# Altium PCB DSP6748_F.PcbDoc (part 7 of 16)
Units mil, origin at the board's own origin, x right, y up, seen from the top; angles counter-clockwise.
Board outline 8188.98 x 4055.12 mil, 4 copper layers (Top Layer, GND, VCC, Bottom Layer); 409 components, 262 nets, 1424 pads, 350 vias.
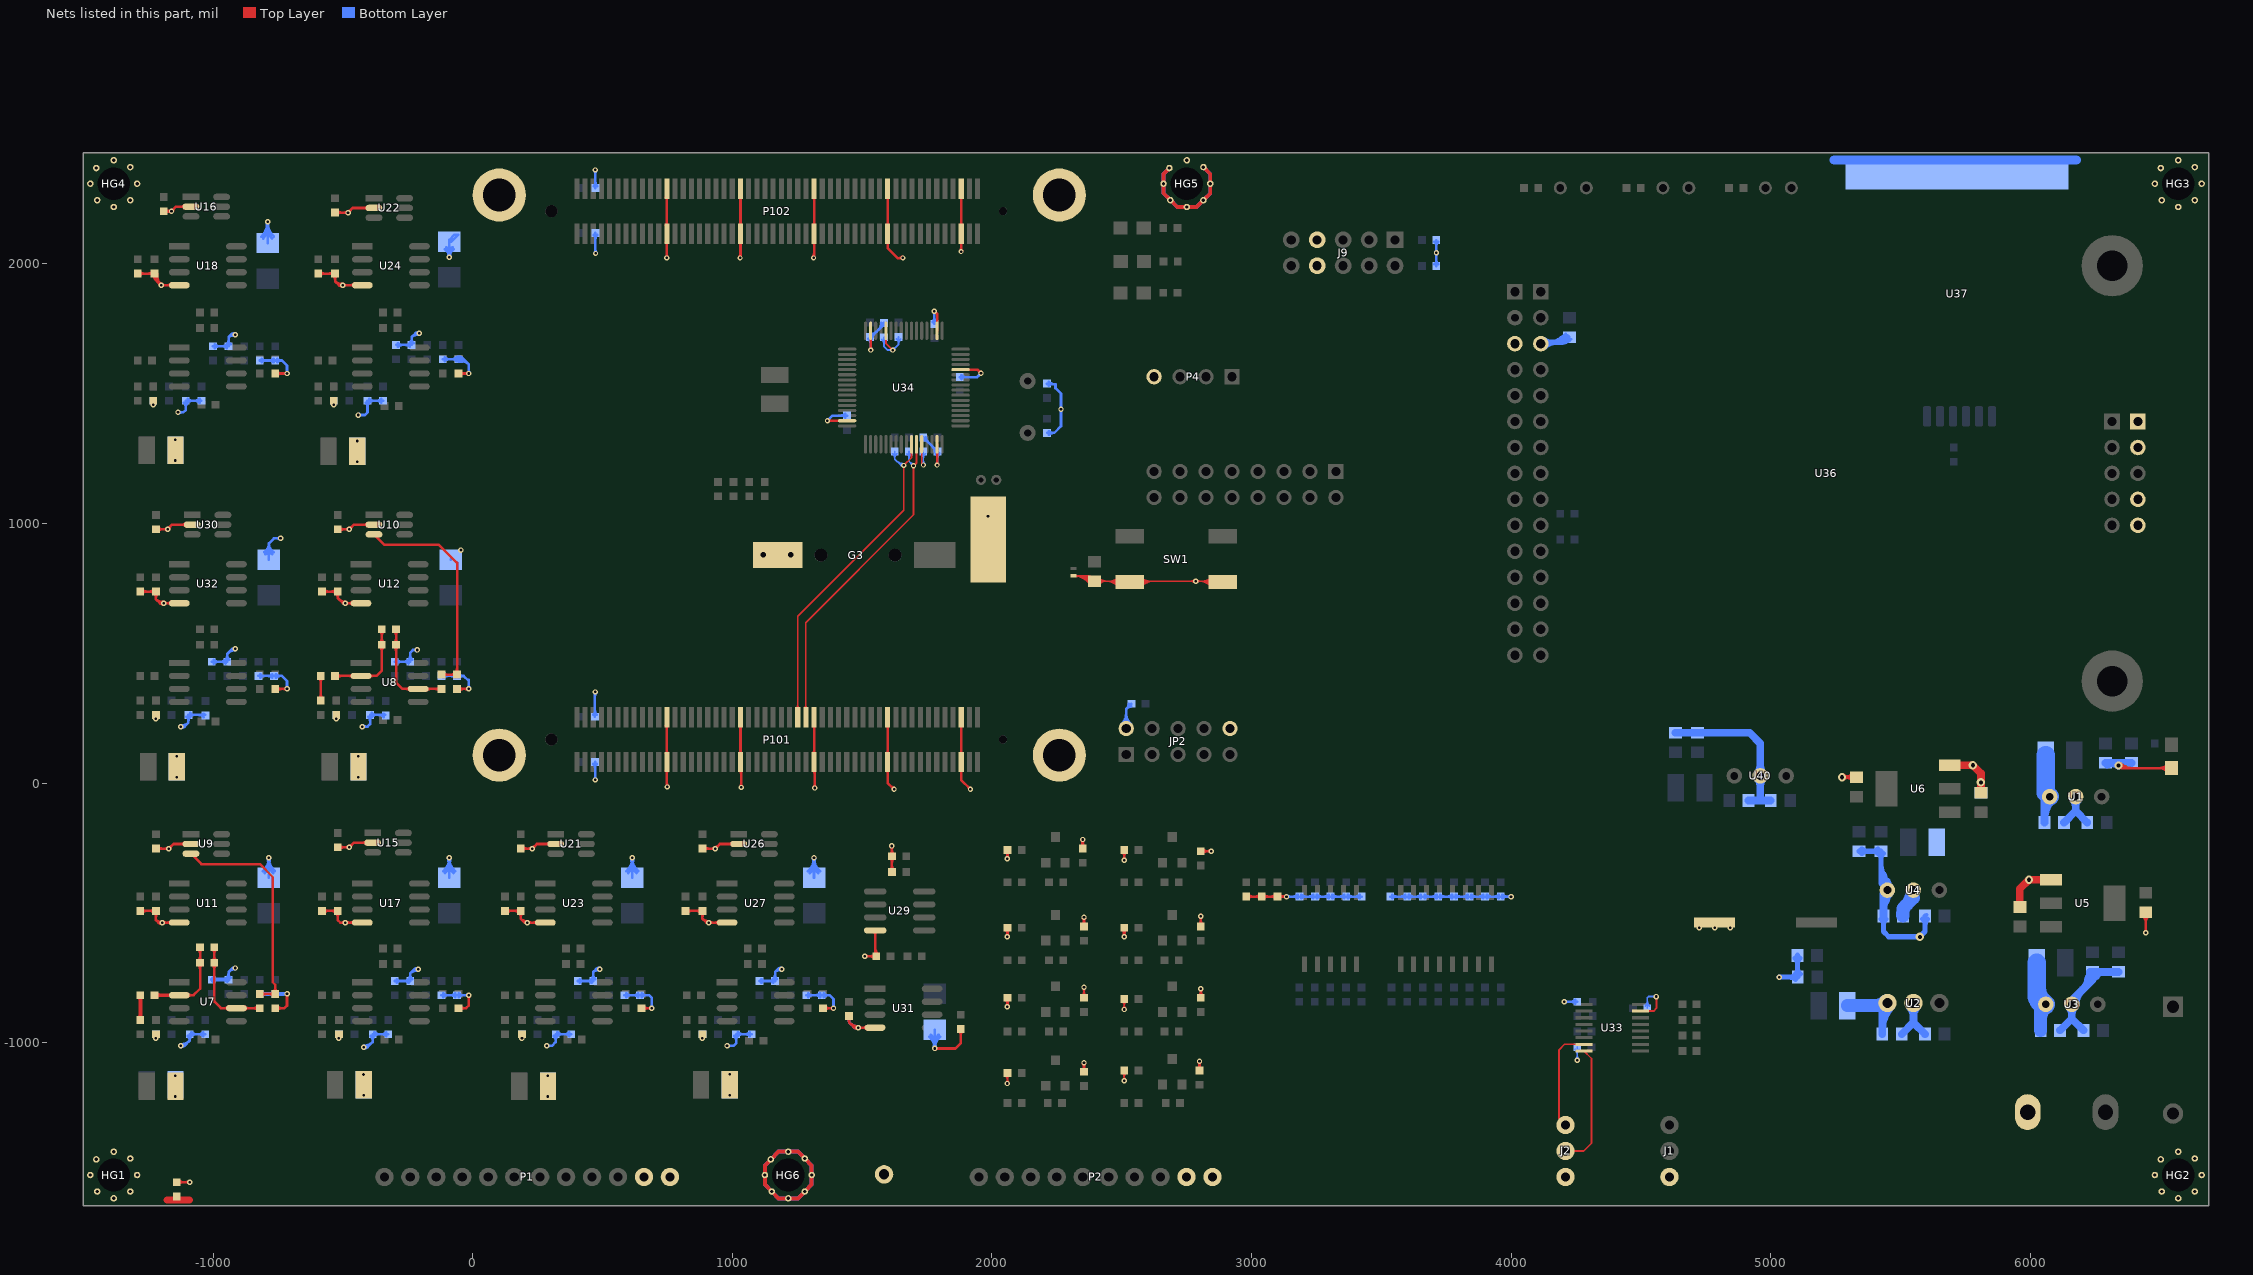
[diagram p9: the nets of this part, all layers, seen from the top]

## Via types
v1: diameter 21, hole 10, Top Layer to Bottom Layer, 244 vias
v2: diameter 20, hole 10, Top Layer to Bottom Layer, 84 vias
v3: diameter 32, hole 16, Top Layer to Bottom Layer, 11 vias
v4: diameter 24, hole 12, Top Layer to Bottom Layer, 7 vias
v5: diameter 39.37, hole 19.68, Top Layer to Bottom Layer, 3 vias
v6: diameter 30, hole 15, Top Layer to Bottom Layer, 1 vias

## Nets (pads, with @x,y where several pads share a name; then routed paths per layer and width w, separated by ;. In a path a pad name is that pad's centre, name@x,y a point inside that pad or via, vN(x,y) a via of type N, cw(c..) or ccw(c..) an arc to the next point about the centre after c; other vN are vias at no path point) (continued)
GND: (continued)
  Bottom Layer w10: C149.2@1764.44,-969.19 cw(c1738.22,-1001.47) 1779.81,-1001.47 ; C149.2@1764.44,-969.19 cw(c1738.22,-1001.47) 1779.81,-1001.47 ; v1@1775.05,-1019.73 ccw(c1763.54,-1013.09) 1776.37,-1009.65 ; v1@1775.05,-1019.73 ccw(c1763.54,-1013.09) 1776.37,-1009.65 ; v1@1775.05,-1019.73 ccw(c1763.54,-1013.09) 1776.37,-1009.65 ; v1@1775.92,-1018.59 ccw(c1766.53,-1009.2) 1779.81,-1009.2 ; v1@1775.92,-1018.59 ccw(c1766.53,-1009.2) 1779.81,-1009.2 ; v1@1775.92,-1018.59 ccw(c1766.53,-1009.2) 1779.81,-1009.2 ; 1776.37,-1009.66 ccw(c1789.2,-1006.22) v1@1782.56,-1017.72 ; 1776.37,-1009.66 ccw(c1789.2,-1006.22) v1@1782.56,-1017.72 ; 1776.37,-1009.66 ccw(c1789.2,-1006.22) v1@1782.56,-1017.72 ; v1@1777.06,-1017.72 ccw(c1770.42,-1006.22) 1783.24,-1009.66 ; v1@1777.06,-1017.72 ccw(c1770.42,-1006.22) 1783.24,-1009.66 ; v1@1777.06,-1017.72 ccw(c1770.42,-1006.22) 1783.24,-1009.66 ; v1(1779.81,-1022.48) cw(c1838.46,-1022.48) C149.2@1801.48,-976.95 ; v1(1779.81,-1022.48) cw(c1838.46,-1022.48) C149.2@1801.48,-976.95 ; v1(1779.81,-1022.48) cw(c1838.46,-1022.48) C149.2@1801.48,-976.95 ; 1779.81,-1009.2 ccw(c1793.09,-1009.2) v1@1783.7,-1018.59 ; 1779.81,-1009.2 ccw(c1793.09,-1009.2) v1@1783.7,-1018.59 ; 1779.81,-1009.2 ccw(c1793.09,-1009.2) v1@1783.7,-1018.59 ; 1779.81,-1001.47 cw(c1821.4,-1001.47) C149.2@1795.18,-969.19 ; 1779.81,-1001.47 cw(c1821.4,-1001.47) C149.2@1795.18,-969.19 ; 1779.81,-1001.47 cw(c1821.4,-1001.47) C149.2@1795.18,-969.19 ; 1783.25,-1009.65 ccw(c1796.08,-1013.09) v1@1784.57,-1019.73 ; 1783.25,-1009.65 ccw(c1796.08,-1013.09) v1@1784.57,-1019.73 ; 1783.25,-1009.65 ccw(c1796.08,-1013.09) v1@1784.57,-1019.73 ; v1@3138.7,-441.37 cw(c3148.09,-450.76) 3148.09,-437.48 ; v1@3138.7,-441.37 cw(c3148.09,-450.76) 3148.09,-437.48 ; v1@3138.7,-441.37 cw(c3148.09,-450.76) 3148.09,-437.48 ; v1@3138.7,-433.59 ccw(c3148.09,-424.2) 3148.09,-437.48 ; v1@3138.7,-433.59 ccw(c3148.09,-424.2) 3148.09,-437.48 ; v1@3138.7,-433.59 ccw(c3148.09,-424.2) 3148.09,-437.48 ; 3160.67,-437.48 cw(c3160.67,-461.62) R124.1@3177.74,-444.55 ; 3160.67,-437.48 ccw(c3160.67,-413.34) R124.1@3177.74,-430.41 ; 3160.67,-437.48 cw(c3160.67,-461.62) R124.1@3177.74,-444.55 ; 3160.67,-437.48 ccw(c3160.67,-413.34) R124.1@3177.74,-430.41 ; 3160.67,-437.48 ccw(c3160.67,-413.34) R124.1@3177.74,-430.41 ; 3160.67,-437.48 cw(c3160.67,-461.62) R124.1@3177.74,-444.55 ; R124.1@3191.88,-444.55 cw(c3208.95,-461.62) 3208.95,-437.48 ; R124.1@3191.88,-444.55 cw(c3208.95,-461.62) 3208.95,-437.48 ; R124.1@3191.88,-444.55 cw(c3208.95,-461.62) 3208.95,-437.48 ; R124.1@3191.88,-430.41 ccw(c3208.95,-413.34) 3208.95,-437.48 ; R124.1@3191.88,-430.41 ccw(c3208.95,-413.34) 3208.95,-437.48 ; R124.1@3191.88,-430.41 ccw(c3208.95,-413.34) 3208.95,-437.48 ; 3220.67,-437.48 cw(c3220.67,-461.62) R125.1@3237.74,-444.55 ; 3220.67,-437.48 ccw(c3220.67,-413.34) R125.1@3237.74,-430.41 ; 3220.67,-437.48 cw(c3220.67,-461.62) R125.1@3237.74,-444.55 ; 3220.67,-437.48 ccw(c3220.67,-413.34) R125.1@3237.74,-430.41 ; 3220.67,-437.48 ccw(c3220.67,-413.34) R125.1@3237.74,-430.41 ; 3220.67,-437.48 cw(c3220.67,-461.62) R125.1@3237.74,-444.55 ; R125.1@3251.88,-444.55 cw(c3268.95,-461.62) 3268.95,-437.48 ; R125.1@3251.88,-444.55 cw(c3268.95,-461.62) 3268.95,-437.48 ; R125.1@3251.88,-444.55 cw(c3268.95,-461.62) 3268.95,-437.48 ; R125.1@3251.88,-430.41 ccw(c3268.95,-413.34) 3268.95,-437.48 ; R125.1@3251.88,-430.41 ccw(c3268.95,-413.34) 3268.95,-437.48 ; R125.1@3251.88,-430.41 ccw(c3268.95,-413.34) 3268.95,-437.48 ; 3280.67,-437.48 cw(c3280.67,-461.62) R126.1@3297.74,-444.55 ; 3280.67,-437.48 ccw(c3280.67,-413.34) R126.1@3297.74,-430.41 ; 3280.67,-437.48 cw(c3280.67,-461.62) R126.1@3297.74,-444.55 ; 3280.67,-437.48 ccw(c3280.67,-413.34) R126.1@3297.74,-430.41 ; 3280.67,-437.48 ccw(c3280.67,-413.34) R126.1@3297.74,-430.41 ; 3280.67,-437.48 cw(c3280.67,-461.62) R126.1@3297.74,-444.55 ; R126.1@3311.88,-444.55 cw(c3328.95,-461.62) 3328.95,-437.48 ; R126.1@3311.88,-444.55 cw(c3328.95,-461.62) 3328.95,-437.48 ; R126.1@3311.88,-444.55 cw(c3328.95,-461.62) 3328.95,-437.48 ; R126.1@3311.88,-430.41 ccw(c3328.95,-413.34) 3328.95,-437.48 ; R126.1@3311.88,-430.41 ccw(c3328.95,-413.34) 3328.95,-437.48 ; R126.1@3311.88,-430.41 ccw(c3328.95,-413.34) 3328.95,-437.48 ; 3340.67,-437.48 cw(c3340.67,-461.62) R127.1@3357.74,-444.55 ; 3340.67,-437.48 ccw(c3340.67,-413.34) R127.1@3357.74,-430.41 ; 3340.67,-437.48 cw(c3340.67,-461.62) R127.1@3357.74,-444.55 ; 3340.67,-437.48 ccw(c3340.67,-413.34) R127.1@3357.74,-430.41 ; 3340.67,-437.48 ccw(c3340.67,-413.34) R127.1@3357.74,-430.41 ; 3340.67,-437.48 cw(c3340.67,-461.62) R127.1@3357.74,-444.55 ; R127.1@3371.88,-444.55 cw(c3388.95,-461.62) 3388.95,-437.48 ; R127.1@3371.88,-444.55 cw(c3388.95,-461.62) 3388.95,-437.48 ; R127.1@3371.88,-444.55 cw(c3388.95,-461.62) 3388.95,-437.48 ; R127.1@3371.88,-430.41 ccw(c3388.95,-413.34) 3388.95,-437.48 ; R127.1@3371.88,-430.41 ccw(c3388.95,-413.34) 3388.95,-437.48 ; R127.1@3371.88,-430.41 ccw(c3388.95,-413.34) 3388.95,-437.48 ; 3400.67,-437.48 cw(c3400.67,-461.62) R128.1@3417.74,-444.55 ; 3400.67,-437.48 ccw(c3400.67,-413.34) R128.1@3417.74,-430.41 ; 3400.67,-437.48 cw(c3400.67,-461.62) R128.1@3417.74,-444.55 ; 3400.67,-437.48 ccw(c3400.67,-413.34) R128.1@3417.74,-430.41 ; 3400.67,-437.48 ccw(c3400.67,-413.34) R128.1@3417.74,-430.41 ; 3400.67,-437.48 cw(c3400.67,-461.62) R128.1@3417.74,-444.55 ; R151.1@3541.88,-444.55 cw(c3558.95,-461.62) 3558.95,-437.48 ; R151.1@3541.88,-444.55 cw(c3558.95,-461.62) 3558.95,-437.48 ; R151.1@3541.88,-444.55 cw(c3558.95,-461.62) 3558.95,-437.48 ; R151.1@3541.88,-430.41 ccw(c3558.95,-413.34) 3558.95,-437.48 ; R151.1@3541.88,-430.41 ccw(c3558.95,-413.34) 3558.95,-437.48 ; R151.1@3541.88,-430.41 ccw(c3558.95,-413.34) 3558.95,-437.48 ; 3575.67,-437.48 cw(c3575.67,-461.62) R150.1@3592.74,-444.55 ; 3575.67,-437.48 ccw(c3575.67,-413.34) R150.1@3592.74,-430.41 ; 3575.67,-437.48 cw(c3575.67,-461.62) R150.1@3592.74,-444.55 ; 3575.67,-437.48 ccw(c3575.67,-413.34) R150.1@3592.74,-430.41 ; 3575.67,-437.48 ccw(c3575.67,-413.34) R150.1@3592.74,-430.41 ; 3575.67,-437.48 cw(c3575.67,-461.62) R150.1@3592.74,-444.55 ; R150.1@3606.88,-444.55 cw(c3623.95,-461.62) 3623.95,-437.48 ; R150.1@3606.88,-444.55 cw(c3623.95,-461.62) 3623.95,-437.48 ; R150.1@3606.88,-444.55 cw(c3623.95,-461.62) 3623.95,-437.48 ; R150.1@3606.88,-430.41 ccw(c3623.95,-413.34) 3623.95,-437.48 ; R150.1@3606.88,-430.41 ccw(c3623.95,-413.34) 3623.95,-437.48 ; R150.1@3606.88,-430.41 ccw(c3623.95,-413.34) 3623.95,-437.48 ; 3635.67,-437.48 cw(c3635.67,-461.62) R149.1@3652.74,-444.55 ; 3635.67,-437.48 ccw(c3635.67,-413.34) R149.1@3652.74,-430.41 ; 3635.67,-437.48 cw(c3635.67,-461.62) R149.1@3652.74,-444.55 ; 3635.67,-437.48 ccw(c3635.67,-413.34) R149.1@3652.74,-430.41 ; 3635.67,-437.48 ccw(c3635.67,-413.34) R149.1@3652.74,-430.41 ; 3635.67,-437.48 cw(c3635.67,-461.62) R149.1@3652.74,-444.55 ; R149.1@3666.88,-444.55 cw(c3683.95,-461.62) 3683.95,-437.48 ; R149.1@3666.88,-444.55 cw(c3683.95,-461.62) 3683.95,-437.48 ; R149.1@3666.88,-444.55 cw(c3683.95,-461.62) 3683.95,-437.48 ; R149.1@3666.88,-430.41 ccw(c3683.95,-413.34) 3683.95,-437.48 ; R149.1@3666.88,-430.41 ccw(c3683.95,-413.34) 3683.95,-437.48 ; R149.1@3666.88,-430.41 ccw(c3683.95,-413.34) 3683.95,-437.48 ; 3695.67,-437.48 cw(c3695.67,-461.62) R148.1@3712.74,-444.55 ; 3695.67,-437.48 ccw(c3695.67,-413.34) R148.1@3712.74,-430.41 ; 3695.67,-437.48 cw(c3695.67,-461.62) R148.1@3712.74,-444.55 ; 3695.67,-437.48 ccw(c3695.67,-413.34) R148.1@3712.74,-430.41 ; 3695.67,-437.48 ccw(c3695.67,-413.34) R148.1@3712.74,-430.41 ; 3695.67,-437.48 cw(c3695.67,-461.62) R148.1@3712.74,-444.55 ; R148.1@3726.88,-444.55 cw(c3743.95,-461.62) 3743.95,-437.48 ; R148.1@3726.88,-444.55 cw(c3743.95,-461.62) 3743.95,-437.48 ; R148.1@3726.88,-444.55 cw(c3743.95,-461.62) 3743.95,-437.48 ; R148.1@3726.88,-430.41 ccw(c3743.95,-413.34) 3743.95,-437.48 ; R148.1@3726.88,-430.41 ccw(c3743.95,-413.34) 3743.95,-437.48 ; R148.1@3726.88,-430.41 ccw(c3743.95,-413.34) 3743.95,-437.48 ; 3755.67,-437.48 cw(c3755.67,-461.62) R147.1@3772.74,-444.55 ; 3755.67,-437.48 ccw(c3755.67,-413.34) R147.1@3772.74,-430.41 ; 3755.67,-437.48 cw(c3755.67,-461.62) R147.1@3772.74,-444.55 ; 3755.67,-437.48 ccw(c3755.67,-413.34) R147.1@3772.74,-430.41 ; 3755.67,-437.48 ccw(c3755.67,-413.34) R147.1@3772.74,-430.41 ; 3755.67,-437.48 cw(c3755.67,-461.62) R147.1@3772.74,-444.55 ; R147.1@3786.88,-444.55 cw(c3803.95,-461.62) 3803.95,-437.48 ; R147.1@3786.88,-444.55 cw(c3803.95,-461.62) 3803.95,-437.48 ; R147.1@3786.88,-444.55 cw(c3803.95,-461.62) 3803.95,-437.48 ; R147.1@3786.88,-430.41 ccw(c3803.95,-413.34) 3803.95,-437.48 ; R147.1@3786.88,-430.41 ccw(c3803.95,-413.34) 3803.95,-437.48 ; R147.1@3786.88,-430.41 ccw(c3803.95,-413.34) 3803.95,-437.48 ; 3815.67,-437.48 cw(c3815.67,-461.62) R146.1@3832.74,-444.55 ; 3815.67,-437.48 ccw(c3815.67,-413.34) R146.1@3832.74,-430.41 ; 3815.67,-437.48 cw(c3815.67,-461.62) R146.1@3832.74,-444.55 ; 3815.67,-437.48 ccw(c3815.67,-413.34) R146.1@3832.74,-430.41 ; 3815.67,-437.48 ccw(c3815.67,-413.34) R146.1@3832.74,-430.41 ; 3815.67,-437.48 cw(c3815.67,-461.62) R146.1@3832.74,-444.55 ; R146.1@3846.88,-444.55 cw(c3863.95,-461.62) 3863.95,-437.48 ; R146.1@3846.88,-444.55 cw(c3863.95,-461.62) 3863.95,-437.48 ; R146.1@3846.88,-444.55 cw(c3863.95,-461.62) 3863.95,-437.48 ; R146.1@3846.88,-430.41 ccw(c3863.95,-413.34) 3863.95,-437.48 ; R146.1@3846.88,-430.41 ccw(c3863.95,-413.34) 3863.95,-437.48 ; R146.1@3846.88,-430.41 ccw(c3863.95,-413.34) 3863.95,-437.48 ; 3875.67,-437.48 cw(c3875.67,-461.62) R145.1@3892.74,-444.55 ; 3875.67,-437.48 ccw(c3875.67,-413.34) R145.1@3892.74,-430.41 ; 3875.67,-437.48 cw(c3875.67,-461.62) R145.1@3892.74,-444.55 ; 3875.67,-437.48 ccw(c3875.67,-413.34) R145.1@3892.74,-430.41 ; 3875.67,-437.48 ccw(c3875.67,-413.34) R145.1@3892.74,-430.41 ; 3875.67,-437.48 cw(c3875.67,-461.62) R145.1@3892.74,-444.55 ; R145.1@3906.88,-444.55 cw(c3923.95,-461.62) 3923.95,-437.48 ; R145.1@3906.88,-444.55 cw(c3923.95,-461.62) 3923.95,-437.48 ; R145.1@3906.88,-444.55 cw(c3923.95,-461.62) 3923.95,-437.48 ; R145.1@3906.88,-430.41 ccw(c3923.95,-413.34) 3923.95,-437.48 ; R145.1@3906.88,-430.41 ccw(c3923.95,-413.34) 3923.95,-437.48 ; R145.1@3906.88,-430.41 ccw(c3923.95,-413.34) 3923.95,-437.48 ; 3935.67,-437.48 cw(c3935.67,-461.62) R144.1@3952.74,-444.55 ; 3935.67,-437.48 ccw(c3935.67,-413.34) R144.1@3952.74,-430.41 ; 3935.67,-437.48 cw(c3935.67,-461.62) R144.1@3952.74,-444.55 ; 3935.67,-437.48 ccw(c3935.67,-413.34) R144.1@3952.74,-430.41 ; 3935.67,-437.48 ccw(c3935.67,-413.34) R144.1@3952.74,-430.41 ; 3935.67,-437.48 cw(c3935.67,-461.62) R144.1@3952.74,-444.55 ; R144.1@3966.88,-444.55 cw(c3983.95,-461.62) 3983.95,-437.48 ; R144.1@3966.88,-444.55 cw(c3983.95,-461.62) 3983.95,-437.48 ; R144.1@3966.88,-444.55 cw(c3983.95,-461.62) 3983.95,-437.48 ; R144.1@3966.88,-430.41 ccw(c3983.95,-413.34) 3983.95,-437.48 ; R144.1@3966.88,-430.41 ccw(c3983.95,-413.34) 3983.95,-437.48 ; R144.1@3966.88,-430.41 ccw(c3983.95,-413.34) 3983.95,-437.48 ; 3986.53,-437.48 cw(c3986.53,-450.76) v1@3995.92,-441.37 ; 3986.53,-437.48 ccw(c3986.53,-424.2) v1@3995.92,-433.59 ; 3986.53,-437.48 cw(c3986.53,-450.76) v1@3995.92,-441.37 ; 3986.53,-437.48 ccw(c3986.53,-424.2) v1@3995.92,-433.59 ; 3986.53,-437.48 ccw(c3986.53,-424.2) v1@3995.92,-433.59 ; 3986.53,-437.48 cw(c3986.53,-450.76) v1@3995.92,-441.37 ; U36.J2-3@4119.71,1692.52 ccw(c4119.71,1820.12) C170.2@4209.94,1729.89 ; U36.J2-3@4119.71,1692.52 ccw(c4119.71,1820.12) C170.2@4209.94,1729.89 ; U36.J2-3@4119.71,1692.52 ccw(c4119.71,1820.12) C170.2@4209.94,1729.89 ; U36.J2-3@4123.65,1704.64 ccw(c4142.75,1730.85) 4149.77,1699.18 ; U36.J2-3@4123.65,1704.64 ccw(c4142.75,1730.85) 4149.77,1699.18 ; U36.J2-3@4123.65,1704.64 ccw(c4142.75,1730.85) 4149.77,1699.18 ; U36.J2-3@4125.42,1681.91 cw(c4151.02,1656.31) 4151.02,1692.52 ; U36.J2-3@4125.42,1681.91 cw(c4151.02,1656.31) 4151.02,1692.52 ; U36.J2-3@4125.42,1681.91 cw(c4151.02,1656.31) 4151.02,1692.52 ; U36.J2-3@4125.42,1703.13 ccw(c4151.02,1728.73) 4151.02,1692.52 ; U36.J2-3@4125.42,1703.13 ccw(c4151.02,1728.73) 4151.02,1692.52 ; U36.J2-3@4125.42,1703.13 ccw(c4151.02,1728.73) 4151.02,1692.52 ; U36.J2-3@4127.37,1700.72 ccw(c4142.51,1710.6) 4145.21,1692.73 ; U36.J2-3@4127.37,1700.72 ccw(c4142.51,1710.6) 4145.21,1692.73 ; U36.J2-3@4127.37,1700.72 ccw(c4142.51,1710.6) 4145.21,1692.73 ; U36.J2-3@4127.47,1684.47 cw(c4154.89,1667.03) 4147.86,1698.76 ; U36.J2-3@4127.47,1684.47 cw(c4154.89,1667.03) 4147.86,1698.76 ; U36.J2-3@4127.47,1684.47 cw(c4154.89,1667.03) 4147.86,1698.76 ; U36.J2-3@4129.54,1712.72 ccw(c4160.15,1754.72) 4171.4,1703.98 ; U36.J2-3@4129.54,1712.72 ccw(c4160.15,1754.72) 4171.4,1703.98 ; U36.J2-3@4129.54,1712.72 ccw(c4160.15,1754.72) 4171.4,1703.98 ; U36.J2-3@4132.49,1674.84 cw(c4175.16,1632.16) 4175.16,1692.52 ; U36.J2-3@4132.49,1674.84 cw(c4175.16,1632.16) 4175.16,1692.52 ; U36.J2-3@4132.49,1674.84 cw(c4175.16,1632.16) 4175.16,1692.52 ; U36.J2-3@4132.49,1710.2 ccw(c4175.16,1752.88) 4175.16,1692.52 ; U36.J2-3@4132.49,1710.2 ccw(c4175.16,1752.88) 4175.16,1692.52 ; U36.J2-3@4132.49,1710.2 ccw(c4175.16,1752.88) 4175.16,1692.52 ; U36.J2-3@4135.75,1706.18 ccw(c4156.82,1719.94) 4160.59,1695.05 ; U36.J2-3@4135.75,1706.18 ccw(c4156.82,1719.94) 4160.59,1695.05 ; U36.J2-3@4135.75,1706.18 ccw(c4156.82,1719.94) 4160.59,1695.05 ; U36.J2-3@4135.85,1679.01 cw(c4165.94,1659.7) 4160.59,1695.05 ; U36.J2-3@4135.85,1679.01 cw(c4165.94,1659.7) 4160.59,1695.05 ; U36.J2-3@4135.85,1679.01 cw(c4165.94,1659.7) 4160.59,1695.05 ; U36.J2-3@4135.9,1679.1 cw(c4183.65,1648.74) 4171.4,1703.98 ; U36.J2-3@4135.9,1679.1 cw(c4183.65,1648.74) 4171.4,1703.98 ; U36.J2-3@4135.9,1679.1 cw(c4183.65,1648.74) 4171.4,1703.98 ; U36.J2-3@4143.85,1692.52 ccw(c4143.85,1795.98) C170.2@4217.01,1722.82 ; U36.J2-3@4143.85,1692.52 ccw(c4143.85,1795.98) C170.2@4217.01,1722.82 ; U36.J2-3@4143.85,1692.52 ccw(c4143.85,1795.98) C170.2@4217.01,1722.82 ; 4167.99,1692.52 ccw(c4167.99,1771.84) C170.2@4224.08,1715.75 ; 4167.99,1692.52 ccw(c4167.99,1771.84) C170.2@4224.08,1715.75 ; 4167.99,1692.52 ccw(c4167.99,1771.84) C170.2@4224.08,1715.75 ; 4192.13,1692.52 ccw(c4192.13,1747.7) C170.2@4231.15,1708.68 ; 4192.13,1692.52 ccw(c4192.13,1747.7) C170.2@4231.15,1708.68 ; 4192.13,1692.52 ccw(c4192.13,1747.7) C170.2@4231.15,1708.68 ; v1@4208.7,-846.37 cw(c4218.09,-855.76) 4218.09,-842.48 ; v1@4208.7,-846.37 cw(c4218.09,-855.76) 4218.09,-842.48 ; v1@4208.7,-846.37 cw(c4218.09,-855.76) 4218.09,-842.48 ; v1@4208.7,-838.59 ccw(c4218.09,-829.2) 4218.09,-842.48 ; v1@4208.7,-838.59 ccw(c4218.09,-829.2) 4218.09,-842.48 ; v1@4208.7,-838.59 ccw(c4218.09,-829.2) 4218.09,-842.48 ; 4230.67,-842.48 cw(c4230.67,-866.62) C162.2@4247.74,-849.55 ; 4230.67,-842.48 ccw(c4230.67,-818.34) C162.2@4247.74,-835.41 ; 4230.67,-842.48 cw(c4230.67,-866.62) C162.2@4247.74,-849.55 ; 4230.67,-842.48 ccw(c4230.67,-818.34) C162.2@4247.74,-835.41 ; 4230.67,-842.48 ccw(c4230.67,-818.34) C162.2@4247.74,-835.41 ; 4230.67,-842.48 cw(c4230.67,-866.62) C162.2@4247.74,-849.55 ; C117.2@-90.19,2085.31 -90.19,2092.52 -70.19,2112.52 -55.19,2112.52 -82.4,2085.31 C117.2@-90.19,2085.31 ; C107.1@-55.4,1642.52 cw(c-54.9,1619.08) -38.33,1635.66 ccw(c-54.9,1619.08) C107.1@-55.4,1642.52 ; C107.1@-49.32,1624.43 cw(c-38.37,1609.34) -25.19,1622.52 ccw(c-38.37,1609.34) C107.1@-49.32,1624.43 ; 4175.58,1698.5 cw(c4198.48,1659.51) 4215.66,1701.33 ccw(c4198.48,1659.51) 4175.58,1698.5 ; 4179.32,1708.33 cw(c4192.8,1689.2) 4209.68,1705.4 ccw(c4192.8,1689.2) 4179.32,1708.33 ; 4187.31,1694.53 ccw(c4169.15,1725.99) 4205.03,1720.27 cw(c4169.15,1725.99) 4187.31,1694.53 ; 4188.84,1715.03 cw(c4201.29,1697.35) 4216.9,1712.33 ccw(c4201.29,1697.35) 4188.84,1715.03 ; 4191.98,1697.22 cw(c4208.98,1667.77) 4217.78,1700.62 ccw(c4208.98,1667.77) 4191.98,1697.22 ; 4192.97,1708.71 cw(c4208.1,1682.94) 4219.46,1710.58 ccw(c4208.1,1682.94) 4192.97,1708.71 ; 4197.31,1711.26 ccw(c4188.47,1726.32) 4205.37,1721.92 cw(c4188.47,1726.32) 4197.31,1711.26 ; 4198.35,1721.74 cw(c4209.79,1705.5) 4224.11,1719.25 ccw(c4209.79,1705.5) 4198.35,1721.74 ; C170.2@4209.83,1696.38 ccw(c4202.85,1708.46) 4215.51,1714.35 cw(c4202.85,1708.46) C170.2@4209.83,1696.38
  Bottom Layer w15: C34.1@-1005.19,-757.48 C35.1@-940.19,-757.48 ; C36.1@-820.19,-812.48 C37.1@-760.19,-812.48 v1(-715.19,-812.48) ; C17.2@5594.81,-512.48 C17.2@5599.81,-507.48 ; C34.1@-999.89,-762.78 cw(c-987.08,-775.59) -987.08,-757.48 ; C34.1@-999.89,-762.78 cw(c-987.08,-775.59) -987.08,-757.48 ; C34.1@-999.89,-762.78 cw(c-987.08,-775.59) -987.08,-757.48 ; C34.1@-999.89,-752.18 ccw(c-987.08,-739.37) -987.08,-757.48 ; C34.1@-999.89,-752.18 ccw(c-987.08,-739.37) -987.08,-757.48 ; C34.1@-999.89,-752.18 ccw(c-987.08,-739.37) -987.08,-757.48 ; -958.3,-757.48 cw(c-958.3,-775.59) C35.1@-945.49,-762.78 ; -958.3,-757.48 ccw(c-958.3,-739.37) C35.1@-945.49,-752.18 ; -958.3,-757.48 cw(c-958.3,-775.59) C35.1@-945.49,-762.78 ; -958.3,-757.48 ccw(c-958.3,-739.37) C35.1@-945.49,-752.18 ; -958.3,-757.48 ccw(c-958.3,-739.37) C35.1@-945.49,-752.18 ; -958.3,-757.48 cw(c-958.3,-775.59) C35.1@-945.49,-762.78 ; C36.1@-814.89,-817.78 cw(c-802.08,-830.59) -802.08,-812.48 ; C36.1@-814.89,-817.78 cw(c-802.08,-830.59) -802.08,-812.48 ; C36.1@-814.89,-817.78 cw(c-802.08,-830.59) -802.08,-812.48 ; C36.1@-814.89,-807.18 ccw(c-802.08,-794.37) -802.08,-812.48 ; C36.1@-814.89,-807.18 ccw(c-802.08,-794.37) -802.08,-812.48 ; C36.1@-814.89,-807.18 ccw(c-802.08,-794.37) -802.08,-812.48 ; -778.3,-812.48 cw(c-778.3,-830.59) C37.1@-765.49,-817.78 ; -778.3,-812.48 ccw(c-778.3,-794.37) C37.1@-765.49,-807.18 ; -778.3,-812.48 cw(c-778.3,-830.59) C37.1@-765.49,-817.78 ; -778.3,-812.48 ccw(c-778.3,-794.37) C37.1@-765.49,-807.18 ; -778.3,-812.48 ccw(c-778.3,-794.37) C37.1@-765.49,-807.18 ; -778.3,-812.48 cw(c-778.3,-830.59) C37.1@-765.49,-817.78 ; C37.1@-754.89,-817.78 cw(c-742.08,-830.59) -742.08,-812.48 ; C37.1@-754.89,-817.78 cw(c-742.08,-830.59) -742.08,-812.48 ; C37.1@-754.89,-817.78 cw(c-742.08,-830.59) -742.08,-812.48 ; C37.1@-754.89,-807.18 ccw(c-742.08,-794.37) -742.08,-812.48 ; C37.1@-754.89,-807.18 ccw(c-742.08,-794.37) -742.08,-812.48 ; C37.1@-754.89,-807.18 ccw(c-742.08,-794.37) -742.08,-812.48
  Bottom Layer w20: v1(5033.27,-747.48) C8.2@5104.81,-747.48 ; C8.2@5103.41,-746.08 C9.2@5103.41,-663.52 ; C15.2@5339.81,-262.48 C16.2@5424.81,-262.48 5424.81,-387.48 U4.3@5449.81,-412.48 ; C14.2@5434.81,-512.48 5434.81,-572.48 5454.81,-592.48 v3(5574.81,-592.48) 5594.81,-572.48 C17.2@5594.81,-512.48 ; 5074.63,-747.48 cw(c5074.63,-777.66) C8.2@5095.97,-756.32 ; 5074.63,-747.48 ccw(c5074.63,-717.3) C8.2@5095.97,-738.64 ; 5074.63,-747.48 cw(c5074.63,-777.66) C8.2@5095.97,-756.32 ; 5074.63,-747.48 ccw(c5074.63,-717.3) C8.2@5095.97,-738.64 ; 5074.63,-747.48 ccw(c5074.63,-717.3) C8.2@5095.97,-738.64 ; 5074.63,-747.48 cw(c5074.63,-777.66) C8.2@5095.97,-756.32 ; C9.2@5094.57,-674.86 cw(c5073.24,-696.2) 5103.41,-696.2 ; C9.2@5094.57,-674.86 cw(c5073.24,-696.2) 5103.41,-696.2 ; C9.2@5094.57,-674.86 cw(c5073.24,-696.2) 5103.41,-696.2 ; C8.2@5095.97,-736.14 ccw(c5078,-718.17) 5103.41,-718.17 ; C8.2@5095.97,-736.14 ccw(c5078,-718.17) 5103.41,-718.17 ; C8.2@5095.97,-736.14 ccw(c5078,-718.17) 5103.41,-718.17 ; 5103.41,-711.43 ccw(c5138.36,-711.43) C8.2@5113.65,-736.14 ; 5103.41,-711.43 ccw(c5138.36,-711.43) C8.2@5113.65,-736.14 ; 5103.41,-711.43 ccw(c5138.36,-711.43) C8.2@5113.65,-736.14 ; 5103.41,-696.2 cw(c5133.59,-696.2) C9.2@5112.25,-674.86 ; 5103.41,-696.2 cw(c5133.59,-696.2) C9.2@5112.25,-674.86 ; 5103.41,-696.2 cw(c5133.59,-696.2) C9.2@5112.25,-674.86 ; C15.2@5351.15,-271.32 cw(c5372.49,-292.66) 5372.49,-262.48 ; C15.2@5351.15,-271.32 cw(c5372.49,-292.66) 5372.49,-262.48 ; C15.2@5351.15,-271.32 cw(c5372.49,-292.66) 5372.49,-262.48 ; C15.2@5351.15,-253.64 ccw(c5372.49,-232.3) 5372.49,-262.48 ; C15.2@5351.15,-253.64 ccw(c5372.49,-232.3) 5372.49,-262.48 ; C15.2@5351.15,-253.64 ccw(c5372.49,-232.3) 5372.49,-262.48 ; 5392.13,-262.48 cw(c5392.13,-292.66) C16.2@5413.47,-271.32 ; 5392.13,-262.48 ccw(c5392.13,-232.3) C16.2@5413.47,-253.64 ; 5392.13,-262.48 cw(c5392.13,-292.66) C16.2@5413.47,-271.32 ; 5392.13,-262.48 ccw(c5392.13,-232.3) C16.2@5413.47,-253.64 ; 5392.13,-262.48 ccw(c5392.13,-232.3) C16.2@5413.47,-253.64 ; 5392.13,-262.48 cw(c5392.13,-292.66) C16.2@5413.47,-271.32 ; C16.2@5415.97,-271.32 cw(c5394.63,-292.66) 5424.81,-292.66 ; C16.2@5415.97,-271.32 cw(c5394.63,-292.66) 5424.81,-292.66 ; C16.2@5415.97,-271.32 cw(c5394.63,-292.66) 5424.81,-292.66 ; 5424.81,-352.12 ccw(c5510.16,-352.12) U4.3@5449.81,-412.48 ; 5424.81,-352.12 ccw(c5510.16,-352.12) U4.3@5449.81,-412.48 ; 5424.81,-352.12 ccw(c5510.16,-352.12) U4.3@5449.81,-412.48 ; 5424.81,-303.84 ccw(c5558.45,-303.84) U4.3@5463.95,-398.34 ; 5424.81,-303.84 ccw(c5558.45,-303.84) U4.3@5463.95,-398.34 ; 5424.81,-303.84 ccw(c5558.45,-303.84) U4.3@5463.95,-398.34 ; 5424.81,-292.66 cw(c5454.99,-292.66) C16.2@5433.65,-271.32 ; 5424.81,-292.66 cw(c5454.99,-292.66) C16.2@5433.65,-271.32 ; 5424.81,-292.66 cw(c5454.99,-292.66) C16.2@5433.65,-271.32 ; C14.2@5425.97,-523.82 cw(c5404.63,-545.16) 5434.81,-545.16 ; C14.2@5425.97,-523.82 cw(c5404.63,-545.16) 5434.81,-545.16 ; C14.2@5425.97,-523.82 cw(c5404.63,-545.16) 5434.81,-545.16 ; 5427.72,-374.22 ccw(c5461.32,-354.82) 5453.72,-392.87 cw(c5461.32,-354.82) 5427.72,-374.22 ; 5427.72,-374.22 cw(c5394.12,-393.62) 5430.87,-406.06 ccw(c5394.12,-393.62) 5427.72,-374.22 ; 5434.81,-545.16 cw(c5464.99,-545.16) C14.2@5443.65,-523.82 ; 5434.81,-545.16 cw(c5464.99,-545.16) C14.2@5443.65,-523.82 ; 5434.81,-545.16 cw(c5464.99,-545.16) C14.2@5443.65,-523.82 ; U4.3@5449.81,-412.48 ccw(c5421.04,-393.24) 5451.01,-375.93 cw(c5421.04,-393.24) U4.3@5449.81,-412.48 ; C17.2@5585.97,-523.82 cw(c5564.63,-545.16) 5594.81,-545.16 ; C17.2@5585.97,-523.82 cw(c5564.63,-545.16) 5594.81,-545.16 ; C17.2@5585.97,-523.82 cw(c5564.63,-545.16) 5594.81,-545.16 ; 5594.81,-545.16 cw(c5624.99,-545.16) C17.2@5603.65,-523.82 ; 5594.81,-545.16 cw(c5624.99,-545.16) C17.2@5603.65,-523.82 ; 5594.81,-545.16 cw(c5624.99,-545.16) C17.2@5603.65,-523.82 ; U4.3@5433.19,-401.36 ccw(c5391.25,-373.31) 5434.94,-348.09 cw(c5391.25,-373.31) U4.3@5433.19,-401.36
  Bottom Layer w30: C204.2@4632.81,193.33 C203.2@4718.81,193.33 4919,193.33 4959.81,152.52 U40.2@4959.81,27.52 4959.81,-64.98 ; C202.2@4914.81,-67.48 C201.2@4999.81,-67.48 ; U40.2@4949.2,16.91 cw(c4923.6,-8.69) 4959.81,-8.69 cw(c4996.02,-8.69) U40.2@4970.42,16.91 ; U40.2@4949.2,38.13 ccw(c4923.6,63.73) 4959.81,63.73 ccw(c4996.02,63.73) U40.2@4970.42,38.13 ; C14.2@5434.81,-512.48 5434.81,-427.48 U4.3@5449.81,-412.48 ; C7.2@5504.81,-967.48 5549.81,-922.48 ; U2.2@5549.81,-827.48 U2.2@5549.81,-847.48 5549.81,-922.48 ; C6.2@5594.81,-967.48 5549.81,-922.48 ; C21.2@5809.81,-37.48 v3(5809.81,2.52) ; C11.2@6114.81,-952.48 6159.81,-907.48 ; C2.2@6129.81,-152.48 6174.81,-107.48 ; U3.2@6159.81,-852.48 6159.81,-907.48 ; U3.2@6159.81,-837.48 6239.81,-757.48 C12.2@6239.81,-727.48 C13.2@6339.81,-727.48 ; U1.2@6174.81,-52.48 6174.81,-107.48 ; C10.2@6204.81,-952.48 6159.81,-907.48 ; C1.2@6219.81,-152.48 6174.81,-107.48 ; C4.2@6289.81,77.52 C3.2@6389.81,77.52 ; 5434.81,-484.91 cw(c5522.24,-484.91) U4.3@5460.42,-423.09 ; 5434.81,-484.91 cw(c5522.24,-484.91) U4.3@5460.42,-423.09 ; 5434.81,-484.91 cw(c5522.24,-484.91) U4.3@5460.42,-423.09 ; U2.2@5535.36,-861.93 cw(c5500.48,-896.81) 5549.81,-896.81 ; U2.2@5535.36,-861.93 cw(c5500.48,-896.81) 5549.81,-896.81 ; U2.2@5535.36,-861.93 cw(c5500.48,-896.81) 5549.81,-896.81 ; 5549.81,-896.81 cw(c5599.14,-896.81) U2.2@5564.26,-861.93 ; 5549.81,-896.81 cw(c5599.14,-896.81) U2.2@5564.26,-861.93 ; 5549.81,-896.81 cw(c5599.14,-896.81) U2.2@5564.26,-861.93 ; U3.2@6149.2,-863.09 cw(c6123.6,-888.69) 6159.81,-888.69 ; U3.2@6149.2,-863.09 cw(c6123.6,-888.69) 6159.81,-888.69 ; U3.2@6149.2,-863.09 cw(c6123.6,-888.69) 6159.81,-888.69 ; 6159.81,-888.69 cw(c6196.02,-888.69) U3.2@6170.42,-863.09 ; 6159.81,-888.69 cw(c6196.02,-888.69) U3.2@6170.42,-863.09 ; 6159.81,-888.69 cw(c6196.02,-888.69) U3.2@6170.42,-863.09 ; U1.2@6164.2,-63.09 cw(c6138.6,-88.69) 6174.81,-88.69 ; U1.2@6164.2,-63.09 cw(c6138.6,-88.69) 6174.81,-88.69 ; U1.2@6164.2,-63.09 cw(c6138.6,-88.69) 6174.81,-88.69 ; U3.2@6174.81,-852.48 cw(c6247.24,-852.48) 6196.02,-801.27 ; U3.2@6174.81,-852.48 cw(c6247.24,-852.48) 6196.02,-801.27 ; U3.2@6174.81,-852.48 cw(c6247.24,-852.48) 6196.02,-801.27 ; 6174.81,-88.69 cw(c6211.02,-88.69) U1.2@6185.42,-63.09 ; 6174.81,-88.69 cw(c6211.02,-88.69) U1.2@6185.42,-63.09 ; 6174.81,-88.69 cw(c6211.02,-88.69) U1.2@6185.42,-63.09 ; 6201.53,-795.76 ccw(c6133.24,-727.48) C12.2@6229.81,-727.48 ; 6201.53,-795.76 ccw(c6133.24,-727.48) C12.2@6229.81,-727.48 ; 6201.53,-795.76 ccw(c6133.24,-727.48) C12.2@6229.81,-727.48 ; C12.2@6252.74,-744.55 ccw(c6235.67,-727.48) C12.2@6259.81,-727.48 ; C12.2@6252.74,-744.55 ccw(c6235.67,-727.48) C12.2@6259.81,-727.48 ; C12.2@6252.74,-744.55 ccw(c6235.67,-727.48) C12.2@6259.81,-727.48 ; C4.2@6313.25,77.52 cw(c6313.25,40.96) v3@6339.1,66.81 ; C4.2@6313.25,77.52 cw(c6313.25,40.96) v3@6339.1,66.81 ; C4.2@6313.25,77.52 cw(c6313.25,40.96) v3@6339.1,66.81 ; v3@6340.52,66.81 cw(c6366.37,40.96) C3.2@6366.37,77.52 ; v3@6340.52,66.81 cw(c6366.37,40.96) C3.2@6366.37,77.52 ; v3@6340.52,66.81 cw(c6366.37,40.96) C3.2@6366.37,77.52 ; U4.3@5438.62,-422.47 cw(c5417.78,-441.07) 5441.97,-455.03 ccw(c5417.78,-441.07) U4.3@5438.62,-422.47 ; 6221.1,-759.99 cw(c6262.48,-771.08) 6241.06,-733.98 ccw(c6262.48,-771.08) 6221.1,-759.99 ; C4.2@6296.28,71.15 cw(c6313.86,42.95) 6322.46,75.05 ccw(c6313.86,42.95) C4.2@6296.28,71.15 ; 6357.16,75.05 cw(c6365.76,42.94) 6383.34,71.15 ccw(c6365.76,42.94) 6357.16,75.05
  other v1: -1145.19,-1207.48 289.81,-1207.48 -420.19,-1202.48 989.81,-1202.48 -1145.19,-1127.48 289.81,-1127.48 989.81,-1122.48 -1220.19,-982.48 -515.19,-982.48 189.81,-982.48 884.81,-982.48 4724.81,-557.48 4784.81,-557.48 4844.81,-557.48 -1195.19,-537.48 -490.19,-537.48 209.81,-537.48 909.81,-537.48 2804.81,-512.48 -1140.19,22.52 -440.19,22.52 -1140.19,102.52 -440.19,102.52 -1220.19,247.52 -525.19,247.52 -1190.19,692.52 -490.19,692.52 2784.77,777.52 -45.19,897.52 -445.19,1237.52 -1145.19,1242.52 -445.19,1317.52 -1145.19,1322.52 -1230.19,1457.52 -535.19,1457.52 -500.19,1917.52
  other v2: 1985.15,1027.52 747.29,2023 1030.29,2023 1313.29,2023 1657.29,2023
  other v4: -420.19,-1122.48
  other v5: 1119.15,879.52 1225.15,879.52
GND_EARTH: HG1.1 HG1.2 HG1.3 HG1.4 HG1.5 HG1.6 HG1.7 HG1.8 HG2.1 HG2.2 HG2.3 HG2.4 HG2.5 HG2.6 HG2.7 HG2.8 HG3.1 HG3.2 HG3.3 HG3.4 HG3.5 HG3.6 HG3.7 HG3.8 HG4.1 HG4.2 HG4.3 HG4.4 HG4.5 HG4.6 HG4.7 HG4.8 HG5.1 HG5.2 HG5.3 HG5.4 HG5.5 HG5.6 HG5.7 HG5.8 HG6.1 HG6.2 HG6.3 HG6.4 HG6.5 HG6.6 HG6.7 HG6.8 L8.2 pad.0@5718,2351 U37.0 | length 3096.7
  Top Layer w15: HG5.1@2683.95,2369 2661.15,2346.2 HG5.2@2661.15,2308.9 2661.15,2271.69 HG5.3@2687.55,2245.29 2713.94,2218.9 HG5.4@2751.15,2218.9 2788.45,2218.9 HG5.5@2814.84,2245.29 2841.15,2271.6 HG5.6@2841.15,2308.9 2841.15,2346.29 HG5.7@2814.84,2372.59 ; 1125.72,-1547.21 HG6.3@1152.11,-1573.6 1178.51,-1600 HG6.4@1215.72,-1600 1253.01,-1600 HG6.5@1279.41,-1573.6 1305.72,-1547.3 HG6.6@1305.72,-1510 1305.72,-1472.61 HG6.7@1279.41,-1446.3 1253.11,-1420 HG6.8@1215.72,-1420 1178.42,-1420 HG6.1@1148.51,-1449.9 1125.72,-1472.7 HG6.2@1125.72,-1510 1125.72,-1547.21
  Top Layer w27: -1178,-1606 -1091,-1606
  Bottom Layer w15: HG5.1@2683.95,2369 2661.15,2346.2 HG5.2@2661.15,2308.9 2661.15,2271.69 HG5.3@2687.55,2245.29 2713.94,2218.9 HG5.4@2751.15,2218.9 2788.45,2218.9 HG5.5@2814.84,2245.29 2841.15,2271.6 HG5.6@2841.15,2308.9 2841.15,2346.29 HG5.7@2814.84,2372.59 ; 1125.72,-1547.21 HG6.2@1125.72,-1510 1125.72,-1472.7 HG6.1@1148.51,-1449.9 1178.42,-1420 HG6.8@1215.72,-1420 1253.11,-1420 HG6.7@1279.41,-1446.3 1305.72,-1472.61 HG6.6@1305.72,-1510 1305.72,-1547.3 HG6.5@1279.41,-1573.6 1253.01,-1600 HG6.4@1215.72,-1600 1178.51,-1600 HG6.3@1152.11,-1573.6 1125.72,-1547.21
  Bottom Layer w35: 5245,2400 6177,2400
GPRS_RXD_SET: J2.2 U33.8 | length 480
  Top Layer w7: J2.2@4209.81,-1417.48 4279.81,-1417.48 4309.81,-1387.48 4309.81,-1061.3 U33.8@4280.56,-1032.05
GPRS_TXD_SET: J2.1 U33.7 | length 404.8
  Top Layer w7: J2.1@4209.81,-1317.48 4184.81,-1292.48 4184.81,-1027.48 4205.83,-1006.46 U33.7@4280.56,-1006.46
I2C1_SCL: P101.56 R160.2 U34.58 | length 1422.5
  Top Layer w7: P101.56@1247.48,288.14 ccw(c1236.65,298.97) 1251.97,298.97 ccw(c1267.29,298.97) P101.56@1256.46,288.14 ; P101.56@1251.97,254.13 1251.97,641.97 1660.15,1050.15 v2(1660.15,1223.52) 1690.34,1253.71 U34.58@1690.34,1305.02
  Bottom Layer w7: R160.2@1617.68,1268.39 cw(c1598.05,1248.76) 1625.81,1248.76 cw(c1653.57,1248.76) R160.2@1633.94,1268.39 ; R160.2@1625.81,1276.52 1625.81,1247.86 1650.15,1223.52 v2(1660.15,1223.52) ; 1631.98,1241.69 ccw(c1660.15,1269.85) v2@1660.15,1230.02 ; 1643.93,1229.74 ccw(c1660.15,1245.95) v2@1660.15,1223.02
I2C1_SDA: P101.58 R161.2 U34.59 | length 1406.3
  Top Layer w7: P101.58@1278.98,288.14 ccw(c1269.79,297.33) 1282.79,297.33 ; 1282.79,300.61 ccw(c1300.43,300.61) P101.58@1287.96,288.14 ; P101.58@1283.47,254.13 1282.79,254.81 1282.79,617.79 1698.15,1033.15 v2(1698.15,1222.52) 1710.02,1234.39 U34.59@1710.02,1305.02 ; v2@1698.15,1229.02 ccw(c1698.15,1244.71) 1709.25,1233.62 ccw(c1720.34,1222.52) v2@1704.65,1222.52
  Bottom Layer w7: R161.2@1672.68,1268.39 cw(c1653.05,1248.76) 1680.81,1248.76 cw(c1708.57,1248.76) R161.2@1688.94,1268.39 ; R161.2@1680.81,1276.52 1680.81,1239.86 v2(1698.15,1222.52) ; v2@1691.65,1222.52 ccw(c1675.96,1222.52) 1687.05,1233.62 ccw(c1698.15,1244.71) v2@1698.15,1229.02
MCUBOOT0: R164.1 U34.60 | length 202.9
  Top Layer w7: U34.60@1729.71,1305.02 1729.71,1231.64 v2(1736.15,1225.2)
  Bottom Layer w7: R164.1@1727.68,1268.39 cw(c1708.05,1248.76) 1735.81,1248.76 cw(c1763.57,1248.76) R164.1@1743.94,1268.39 ; v2@1731.55,1229.8 ccw(c1721.28,1240.07) 1735.81,1240.07 ; 1735.81,1241.71 ccw(c1752.66,1241.71) v2@1740.75,1229.8 ; R164.1@1735.81,1276.52 1735.81,1224.86 v2(1736.15,1225.2)
MCUBOOT1: R162.2 R163.1 U34.28 | length 358
  Top Layer w7: U34.28@1591.91,1742.02 1591.91,1693.76 v2(1618.15,1667.52)
  Bottom Layer w7: R163.1@1575.78,1709.17 cw(c1556.15,1689.53) 1583.91,1689.53 cw(c1611.67,1689.53) R163.1@1592.04,1709.17 ; R163.1@1583.91,1717.3 1583.91,1681.76 1598.15,1667.52 v2(1618.15,1667.52) 1640.81,1690.18 R162.2@1640.81,1718.52 ; v2@1613.55,1662.92 ccw(c1602.46,1651.83) 1602.46,1667.52 ccw(c1602.46,1683.21) v2@1613.55,1672.12 ; v2@1618.15,1674.02 ccw(c1618.15,1689.71) 1629.25,1678.62 ccw(c1640.34,1667.52) v2@1624.65,1667.52 ; R162.2@1632.68,1710.39 cw(c1613.05,1690.76) 1640.81,1690.76 cw(c1668.57,1690.76) R162.2@1648.94,1710.39
NetC2_1: C2.1 L1.1 U1.3 | length 356.6
  Bottom Layer w30: C2.1@6054.81,-152.48 6054.81,-72.48 U1.3@6074.81,-52.48 ; C2.1@6054.81,-136.98 cw(c6159.31,-136.98) U1.3@6085.42,-63.09
  Bottom Layer w70: L1.1@6059.69,107.52 6059.69,-37.36 U1.3@6074.81,-52.48
NetC7_1: C7.1 L2.1 U2.3 | length 412.1
  Bottom Layer w30: C7.1@5429.81,-967.48 5429.81,-867.48 U2.3@5439.81,-857.48 ; C7.1@5429.81,-945.09 cw(c5547.42,-945.09) U2.3@5464.26,-861.93
  Bottom Layer w50: L2.1@5294.93,-857.48 5439.81,-857.48 U2.3@5449.81,-847.48 ; 5400.48,-857.48 ccw(c5400.48,-798.15) U2.3@5442.43,-840.1
NetC11_1: C11.1 L3.1 U3.3 | length 488.1
  Bottom Layer w50: C11.1@6039.81,-952.48 6039.81,-872.48 U3.3@6059.81,-852.48 ; 6039.81,-912.84 cw(c6120.16,-912.84) U3.3@6063.35,-856.02
  Bottom Layer w70: 6024.69,-779.77 ccw(c6132.52,-779.77) U3.3@6056.27,-856.02 ; L3.1@6024.69,-692.48 6024.69,-817.36 ; U3.3@6059.05,-857.42 cw(c6065.22,-817.36) 6024.69,-817.36 ; U3.3@6059.81,-852.48 6024.69,-817.36
NetC14_1: C14.1 L4.1 U4.2 | length 200.3
  Bottom Layer w50: C14.1@5507.31,-509.98 cw(c5567.66,-509.98) 5524.99,-467.3 ; C14.1@5509.81,-512.48 5509.81,-482.48 5549.81,-442.48 ; 5520.06,-472.23 ccw(c5460.31,-412.48) U4.2@5544.81,-412.48
NetC23_1: C23.1 R1.2 R3.1 U7.6 | length 1014.7
  Top Layer w10: C23.1@-995.19,-627.48 R1.2@-995.19,-692.48 -995.19,-842.48 -970.19,-867.48 U7.6@-910.19,-867.48 R3.1@-820.19,-867.48 ; R1.2@-1002.26,-699.55 cw(c-1019.33,-716.62) -995.19,-716.62 ; R1.2@-1002.26,-699.55 cw(c-1019.33,-716.62) -995.19,-716.62 ; R1.2@-1002.26,-699.55 cw(c-1019.33,-716.62) -995.19,-716.62 ; R1.2@-1002.26,-685.41 ccw(c-1019.33,-668.34) -995.19,-668.34 ; R1.2@-1002.26,-685.41 ccw(c-1019.33,-668.34) -995.19,-668.34 ; R1.2@-1002.26,-685.41 ccw(c-1019.33,-668.34) -995.19,-668.34 ; C23.1@-1002.26,-639.55 cw(c-1019.33,-656.62) -995.19,-656.62 ; C23.1@-1002.26,-639.55 cw(c-1019.33,-656.62) -995.19,-656.62 ; C23.1@-1002.26,-639.55 cw(c-1019.33,-656.62) -995.19,-656.62 ; -995.19,-716.62 cw(c-971.05,-716.62) R1.2@-988.12,-699.55 ; -995.19,-716.62 cw(c-971.05,-716.62) R1.2@-988.12,-699.55 ; -995.19,-716.62 cw(c-971.05,-716.62) R1.2@-988.12,-699.55 ; -995.19,-668.34 ccw(c-971.05,-668.34) R1.2@-988.12,-685.41 ; -995.19,-668.34 ccw(c-971.05,-668.34) R1.2@-988.12,-685.41 ; -995.19,-668.34 ccw(c-971.05,-668.34) R1.2@-988.12,-685.41 ; -995.19,-656.62 cw(c-971.05,-656.62) C23.1@-988.12,-639.55 ; -995.19,-656.62 cw(c-971.05,-656.62) C23.1@-988.12,-639.55 ; -995.19,-656.62 cw(c-971.05,-656.62) C23.1@-988.12,-639.55 ; -955.09,-867.48 cw(c-955.09,-884.38) U7.6@-943.14,-872.43 ; -955.09,-867.48 ccw(c-955.09,-850.58) U7.6@-943.14,-862.53 ; -955.09,-867.48 cw(c-955.09,-884.38) U7.6@-943.14,-872.43 ; -955.09,-867.48 ccw(c-955.09,-850.58) U7.6@-943.14,-862.53 ; -955.09,-867.48 ccw(c-955.09,-850.58) U7.6@-943.14,-862.53 ; -955.09,-867.48 cw(c-955.09,-884.38) U7.6@-943.14,-872.43 ; U7.6@-877.24,-872.43 cw(c-865.29,-884.38) -865.29,-867.48 ; U7.6@-877.24,-872.43 cw(c-865.29,-884.38) -865.29,-867.48 ; U7.6@-877.24,-872.43 cw(c-865.29,-884.38) -865.29,-867.48 ; U7.6@-877.24,-862.53 ccw(c-865.29,-850.58) -865.29,-867.48 ; U7.6@-877.24,-862.53 ccw(c-865.29,-850.58) -865.29,-867.48 ; U7.6@-877.24,-862.53 ccw(c-865.29,-850.58) -865.29,-867.48 ; -844.33,-867.48 cw(c-844.33,-891.62) R3.1@-827.26,-874.55 ; -844.33,-867.48 ccw(c-844.33,-843.34) R3.1@-827.26,-860.41 ; -844.33,-867.48 cw(c-844.33,-891.62) R3.1@-827.26,-874.55 ; -844.33,-867.48 ccw(c-844.33,-843.34) R3.1@-827.26,-860.41 ; -844.33,-867.48 ccw(c-844.33,-843.34) R3.1@-827.26,-860.41 ; -844.33,-867.48 cw(c-844.33,-891.62) R3.1@-827.26,-874.55
NetC23_2: C23.2 R1.1 R5.2 U7.2 | length 856.6
  Top Layer w10: U7.2@-1130.19,-817.48 -1075.19,-817.48 -1050.19,-792.48 R1.1@-1050.19,-692.48 C23.2@-1050.19,-627.48 ; U7.2@-1097.24,-822.43 cw(c-1085.29,-834.38) -1085.29,-817.48 ; U7.2@-1097.24,-822.43 cw(c-1085.29,-834.38) -1085.29,-817.48 ; U7.2@-1097.24,-822.43 cw(c-1085.29,-834.38) -1085.29,-817.48 ; U7.2@-1097.24,-812.53 ccw(c-1085.29,-800.58) -1085.29,-817.48 ; U7.2@-1097.24,-812.53 ccw(c-1085.29,-800.58) -1085.29,-817.48 ; U7.2@-1097.24,-812.53 ccw(c-1085.29,-800.58) -1085.29,-817.48 ; R1.1@-1057.26,-699.55 cw(c-1074.33,-716.62) -1050.19,-716.62 ; R1.1@-1057.26,-699.55 cw(c-1074.33,-716.62) -1050.19,-716.62 ; R1.1@-1057.26,-699.55 cw(c-1074.33,-716.62) -1050.19,-716.62 ; R1.1@-1057.26,-685.41 ccw(c-1074.33,-668.34) -1050.19,-668.34 ; R1.1@-1057.26,-685.41 ccw(c-1074.33,-668.34) -1050.19,-668.34 ; R1.1@-1057.26,-685.41 ccw(c-1074.33,-668.34) -1050.19,-668.34 ; C23.2@-1057.26,-639.55 cw(c-1074.33,-656.62) -1050.19,-656.62 ; C23.2@-1057.26,-639.55 cw(c-1074.33,-656.62) -1050.19,-656.62 ; C23.2@-1057.26,-639.55 cw(c-1074.33,-656.62) -1050.19,-656.62 ; -1050.19,-716.62 cw(c-1026.05,-716.62) R1.1@-1043.12,-699.55 ; -1050.19,-716.62 cw(c-1026.05,-716.62) R1.1@-1043.12,-699.55 ; -1050.19,-716.62 cw(c-1026.05,-716.62) R1.1@-1043.12,-699.55 ; -1050.19,-668.34 ccw(c-1026.05,-668.34) R1.1@-1043.12,-685.41 ; -1050.19,-668.34 ccw(c-1026.05,-668.34) R1.1@-1043.12,-685.41 ; -1050.19,-668.34 ccw(c-1026.05,-668.34) R1.1@-1043.12,-685.41 ; -1050.19,-656.62 cw(c-1026.05,-656.62) C23.2@-1043.12,-639.55 ; -1050.19,-656.62 cw(c-1026.05,-656.62) C23.2@-1043.12,-639.55 ; -1050.19,-656.62 cw(c-1026.05,-656.62) C23.2@-1043.12,-639.55
  Top Layer w15: R5.2@-1225.19,-817.48 U7.2@-1130.19,-817.48 ; R5.2@-1219.89,-822.78 cw(c-1207.08,-835.59) -1207.08,-817.48 ; R5.2@-1219.89,-822.78 cw(c-1207.08,-835.59) -1207.08,-817.48 ; R5.2@-1219.89,-822.78 cw(c-1207.08,-835.59) -1207.08,-817.48 ; R5.2@-1219.89,-812.18 ccw(c-1207.08,-799.37) -1207.08,-817.48 ; R5.2@-1219.89,-812.18 ccw(c-1207.08,-799.37) -1207.08,-817.48 ; R5.2@-1219.89,-812.18 ccw(c-1207.08,-799.37) -1207.08,-817.48
NetC24_1: C24.1 R2.2 R4.1 U8.6 | length 1004.7
  Top Layer w10: C24.1@-295.19,592.52 R2.2@-295.19,532.52 -295.19,387.52 -270.19,362.52 U8.6@-210.19,362.52 R4.1@-120.19,362.52 ; R2.2@-302.26,525.45 cw(c-319.33,508.38) -295.19,508.38 ; R2.2@-302.26,525.45 cw(c-319.33,508.38) -295.19,508.38 ; R2.2@-302.26,525.45 cw(c-319.33,508.38) -295.19,508.38 ; R2.2@-302.26,539.59 ccw(c-319.33,556.66) -295.19,556.66 ; R2.2@-302.26,539.59 ccw(c-319.33,556.66) -295.19,556.66 ; R2.2@-302.26,539.59 ccw(c-319.33,556.66) -295.19,556.66 ; C24.1@-302.26,585.45 cw(c-319.33,568.38) -295.19,568.38 ; C24.1@-302.26,585.45 cw(c-319.33,568.38) -295.19,568.38 ; C24.1@-302.26,585.45 cw(c-319.33,568.38) -295.19,568.38 ; -295.19,508.38 cw(c-271.05,508.38) R2.2@-288.12,525.45 ; -295.19,508.38 cw(c-271.05,508.38) R2.2@-288.12,525.45 ; -295.19,508.38 cw(c-271.05,508.38) R2.2@-288.12,525.45 ; -295.19,556.66 ccw(c-271.05,556.66) R2.2@-288.12,539.59 ; -295.19,556.66 ccw(c-271.05,556.66) R2.2@-288.12,539.59 ; -295.19,556.66 ccw(c-271.05,556.66) R2.2@-288.12,539.59 ; -295.19,568.38 cw(c-271.05,568.38) C24.1@-288.12,585.45 ; -295.19,568.38 cw(c-271.05,568.38) C24.1@-288.12,585.45 ; -295.19,568.38 cw(c-271.05,568.38) C24.1@-288.12,585.45 ; -255.09,362.52 cw(c-255.09,345.62) U8.6@-243.14,357.57 ; -255.09,362.52 ccw(c-255.09,379.42) U8.6@-243.14,367.47 ; -255.09,362.52 cw(c-255.09,345.62) U8.6@-243.14,357.57 ; -255.09,362.52 ccw(c-255.09,379.42) U8.6@-243.14,367.47 ; -255.09,362.52 ccw(c-255.09,379.42) U8.6@-243.14,367.47 ; -255.09,362.52 cw(c-255.09,345.62) U8.6@-243.14,357.57 ; U8.6@-177.24,357.57 cw(c-165.29,345.62) -165.29,362.52 ; U8.6@-177.24,357.57 cw(c-165.29,345.62) -165.29,362.52 ; U8.6@-177.24,357.57 cw(c-165.29,345.62) -165.29,362.52 ; U8.6@-177.24,367.47 ccw(c-165.29,379.42) -165.29,362.52 ; U8.6@-177.24,367.47 ccw(c-165.29,379.42) -165.29,362.52 ; U8.6@-177.24,367.47 ccw(c-165.29,379.42) -165.29,362.52 ; -144.33,362.52 cw(c-144.33,338.38) R4.1@-127.26,355.45 ; -144.33,362.52 ccw(c-144.33,386.66) R4.1@-127.26,369.59 ; -144.33,362.52 cw(c-144.33,338.38) R4.1@-127.26,355.45 ; -144.33,362.52 ccw(c-144.33,386.66) R4.1@-127.26,369.59 ; -144.33,362.52 ccw(c-144.33,386.66) R4.1@-127.26,369.59 ; -144.33,362.52 cw(c-144.33,338.38) R4.1@-127.26,355.45
NetC24_2: C24.2 R2.1 R6.2 U8.2 | length 962.6
  Top Layer w10: R6.2@-530.19,412.52 U8.2@-430.19,412.52 -370.19,412.52 -350.19,432.52 R2.1@-350.19,532.52 C24.2@-350.19,592.52 ; R6.2@-523.12,405.45 cw(c-506.05,388.38) -506.05,412.52 ; R6.2@-523.12,405.45 cw(c-506.05,388.38) -506.05,412.52 ; R6.2@-523.12,405.45 cw(c-506.05,388.38) -506.05,412.52 ; R6.2@-523.12,419.59 ccw(c-506.05,436.66) -506.05,412.52 ; R6.2@-523.12,419.59 ccw(c-506.05,436.66) -506.05,412.52 ; R6.2@-523.12,419.59 ccw(c-506.05,436.66) -506.05,412.52 ; -475.09,412.52 cw(c-475.09,395.62) U8.2@-463.14,407.57 ; -475.09,412.52 ccw(c-475.09,429.42) U8.2@-463.14,417.47 ; -475.09,412.52 cw(c-475.09,395.62) U8.2@-463.14,407.57 ; -475.09,412.52 ccw(c-475.09,429.42) U8.2@-463.14,417.47 ; -475.09,412.52 ccw(c-475.09,429.42) U8.2@-463.14,417.47 ; -475.09,412.52 cw(c-475.09,395.62) U8.2@-463.14,407.57 ; U8.2@-397.24,407.57 cw(c-385.29,395.62) -385.29,412.52 ; U8.2@-397.24,407.57 cw(c-385.29,395.62) -385.29,412.52 ; U8.2@-397.24,407.57 cw(c-385.29,395.62) -385.29,412.52 ; U8.2@-397.24,417.47 ccw(c-385.29,429.42) -385.29,412.52 ; U8.2@-397.24,417.47 ccw(c-385.29,429.42) -385.29,412.52 ; U8.2@-397.24,417.47 ccw(c-385.29,429.42) -385.29,412.52 ; R2.1@-357.26,525.45 cw(c-374.33,508.38) -350.19,508.38 ; R2.1@-357.26,525.45 cw(c-374.33,508.38) -350.19,508.38 ; R2.1@-357.26,525.45 cw(c-374.33,508.38) -350.19,508.38 ; R2.1@-357.26,539.59 ccw(c-374.33,556.66) -350.19,556.66 ; R2.1@-357.26,539.59 ccw(c-374.33,556.66) -350.19,556.66 ; R2.1@-357.26,539.59 ccw(c-374.33,556.66) -350.19,556.66 ; C24.2@-357.26,585.45 cw(c-374.33,568.38) -350.19,568.38 ; C24.2@-357.26,585.45 cw(c-374.33,568.38) -350.19,568.38 ; C24.2@-357.26,585.45 cw(c-374.33,568.38) -350.19,568.38 ; -350.19,508.38 cw(c-326.05,508.38) R2.1@-343.12,525.45 ; -350.19,508.38 cw(c-326.05,508.38) R2.1@-343.12,525.45 ; -350.19,508.38 cw(c-326.05,508.38) R2.1@-343.12,525.45 ; -350.19,556.66 ccw(c-326.05,556.66) R2.1@-343.12,539.59 ; -350.19,556.66 ccw(c-326.05,556.66) R2.1@-343.12,539.59 ; -350.19,556.66 ccw(c-326.05,556.66) R2.1@-343.12,539.59 ; -350.19,568.38 cw(c-326.05,568.38) C24.2@-343.12,585.45 ; -350.19,568.38 cw(c-326.05,568.38) C24.2@-343.12,585.45 ; -350.19,568.38 cw(c-326.05,568.38) C24.2@-343.12,585.45
NetC26_2: C26.2 R5.1 | length 265.7
  Top Layer w15: C26.2@-1280.19,-912.48 R5.1@-1280.19,-817.48 ; C26.2@-1285.49,-907.18 ccw(c-1298.3,-894.37) -1280.19,-894.37 ; C26.2@-1285.49,-907.18 ccw(c-1298.3,-894.37) -1280.19,-894.37 ; C26.2@-1285.49,-907.18 ccw(c-1298.3,-894.37) -1280.19,-894.37 ; R5.1@-1285.49,-822.78 cw(c-1298.3,-835.59) -1280.19,-835.59 ; R5.1@-1285.49,-822.78 cw(c-1298.3,-835.59) -1280.19,-835.59 ; R5.1@-1285.49,-822.78 cw(c-1298.3,-835.59) -1280.19,-835.59 ; -1280.19,-894.37 ccw(c-1262.08,-894.37) C26.2@-1274.89,-907.18 ; -1280.19,-894.37 ccw(c-1262.08,-894.37) C26.2@-1274.89,-907.18 ; -1280.19,-894.37 ccw(c-1262.08,-894.37) C26.2@-1274.89,-907.18 ; -1280.19,-835.59 cw(c-1262.08,-835.59) R5.1@-1274.89,-822.78 ; -1280.19,-835.59 cw(c-1262.08,-835.59) R5.1@-1274.89,-822.78 ; -1280.19,-835.59 cw(c-1262.08,-835.59) R5.1@-1274.89,-822.78
NetC27_2: C27.2 R6.1 | length 322.5
  Top Layer w10: C27.2@-585.19,317.52 R6.1@-585.19,412.52 ; C27.2@-592.26,324.59 ccw(c-609.33,341.66) -585.19,341.66 ; C27.2@-592.26,324.59 ccw(c-609.33,341.66) -585.19,341.66 ; C27.2@-592.26,324.59 ccw(c-609.33,341.66) -585.19,341.66 ; R6.1@-592.26,405.45 cw(c-609.33,388.38) -585.19,388.38 ; R6.1@-592.26,405.45 cw(c-609.33,388.38) -585.19,388.38 ; R6.1@-592.26,405.45 cw(c-609.33,388.38) -585.19,388.38 ; -585.19,341.66 ccw(c-561.05,341.66) C27.2@-578.12,324.59 ; -585.19,341.66 ccw(c-561.05,341.66) C27.2@-578.12,324.59 ; -585.19,341.66 ccw(c-561.05,341.66) C27.2@-578.12,324.59 ; -585.19,388.38 cw(c-561.05,388.38) R6.1@-578.12,405.45 ; -585.19,388.38 cw(c-561.05,388.38) R6.1@-578.12,405.45 ; -585.19,388.38 cw(c-561.05,388.38) R6.1@-578.12,405.45
NetC28_2: C28.2 R3.2 U9.3 | length 1193.2
  Top Layer w10: U9.3@-1085.19,-272.28 -1044.99,-312.48 -820.19,-312.48 -770.19,-362.48 -770.19,-767.48 -760.19,-777.48 C28.2@-760.19,-797.89 ; R3.2@-820.19,-812.48 C28.2@-760.19,-812.48 ; R3.2@-813.12,-819.55 cw(c-796.05,-836.62) -796.05,-812.48 ; R3.2@-813.12,-819.55 cw(c-796.05,-836.62) -796.05,-812.48 ; R3.2@-813.12,-819.55 cw(c-796.05,-836.62) -796.05,-812.48 ; R3.2@-813.12,-805.41 ccw(c-796.05,-788.34) -796.05,-812.48 ; R3.2@-813.12,-805.41 ccw(c-796.05,-788.34) -796.05,-812.48 ; R3.2@-813.12,-805.41 ccw(c-796.05,-788.34) -796.05,-812.48 ; -784.33,-812.48 cw(c-784.33,-836.62) C28.2@-767.26,-819.55 ; -784.33,-812.48 ccw(c-784.33,-788.34) C28.2@-767.26,-805.41 ; -784.33,-812.48 cw(c-784.33,-836.62) C28.2@-767.26,-819.55 ; -784.33,-812.48 ccw(c-784.33,-788.34) C28.2@-767.26,-805.41 ; -784.33,-812.48 ccw(c-784.33,-788.34) C28.2@-767.26,-805.41 ; -784.33,-812.48 cw(c-784.33,-836.62) C28.2@-767.26,-819.55 ; C28.2@-767.26,-805.41 ccw(c-784.33,-788.34) -760.19,-788.34 ; C28.2@-767.26,-805.41 ccw(c-784.33,-788.34) -760.19,-788.34 ; C28.2@-767.26,-805.41 ccw(c-784.33,-788.34) -760.19,-788.34 ; -760.19,-788.34 ccw(c-736.05,-788.34) C28.2@-753.12,-805.41 ; -760.19,-788.34 ccw(c-736.05,-788.34) C28.2@-753.12,-805.41 ; -760.19,-788.34 ccw(c-736.05,-788.34) C28.2@-753.12,-805.41
NetC29_2: C29.2 R4.2 U10.3 | length 1196.9
  Top Layer w10: U10.3@-380.19,957.72 -339.99,917.52 -130.19,917.52 -60.19,847.52 C29.2@-60.19,417.52 R4.2@-120.19,417.52 ; R4.2@-113.12,410.45 cw(c-96.05,393.38) -96.05,417.52 ; R4.2@-113.12,410.45 cw(c-96.05,393.38) -96.05,417.52 ; R4.2@-113.12,410.45 cw(c-96.05,393.38) -96.05,417.52 ; R4.2@-113.12,424.59 ccw(c-96.05,441.66) -96.05,417.52 ; R4.2@-113.12,424.59 ccw(c-96.05,441.66) -96.05,417.52 ; R4.2@-113.12,424.59 ccw(c-96.05,441.66) -96.05,417.52 ; -84.33,417.52 cw(c-84.33,393.38) C29.2@-67.26,410.45 ; -84.33,417.52 ccw(c-84.33,441.66) C29.2@-67.26,424.59 ; -84.33,417.52 cw(c-84.33,393.38) C29.2@-67.26,410.45 ; -84.33,417.52 ccw(c-84.33,441.66) C29.2@-67.26,424.59 ; -84.33,417.52 ccw(c-84.33,441.66) C29.2@-67.26,424.59 ; -84.33,417.52 cw(c-84.33,393.38) C29.2@-67.26,410.45 ; C29.2@-67.26,424.59 ccw(c-84.33,441.66) -60.19,441.66 ; C29.2@-67.26,424.59 ccw(c-84.33,441.66) -60.19,441.66 ; C29.2@-67.26,424.59 ccw(c-84.33,441.66) -60.19,441.66 ; -60.19,441.66 ccw(c-36.05,441.66) C29.2@-53.12,424.59 ; -60.19,441.66 ccw(c-36.05,441.66) C29.2@-53.12,424.59 ; -60.19,441.66 ccw(c-36.05,441.66) C29.2@-53.12,424.59